# Altium PCB POWER_TESTER_V2.PcbDoc (part 2 of 2)
Units mm, origin at the board's own origin, x right, y up, seen from the top; angles counter-clockwise.
Board outline 100 x 151 mm, 2 copper layers (Top Layer, Bottom Layer); 154 components, 159 nets, 653 pads, 187 vias.
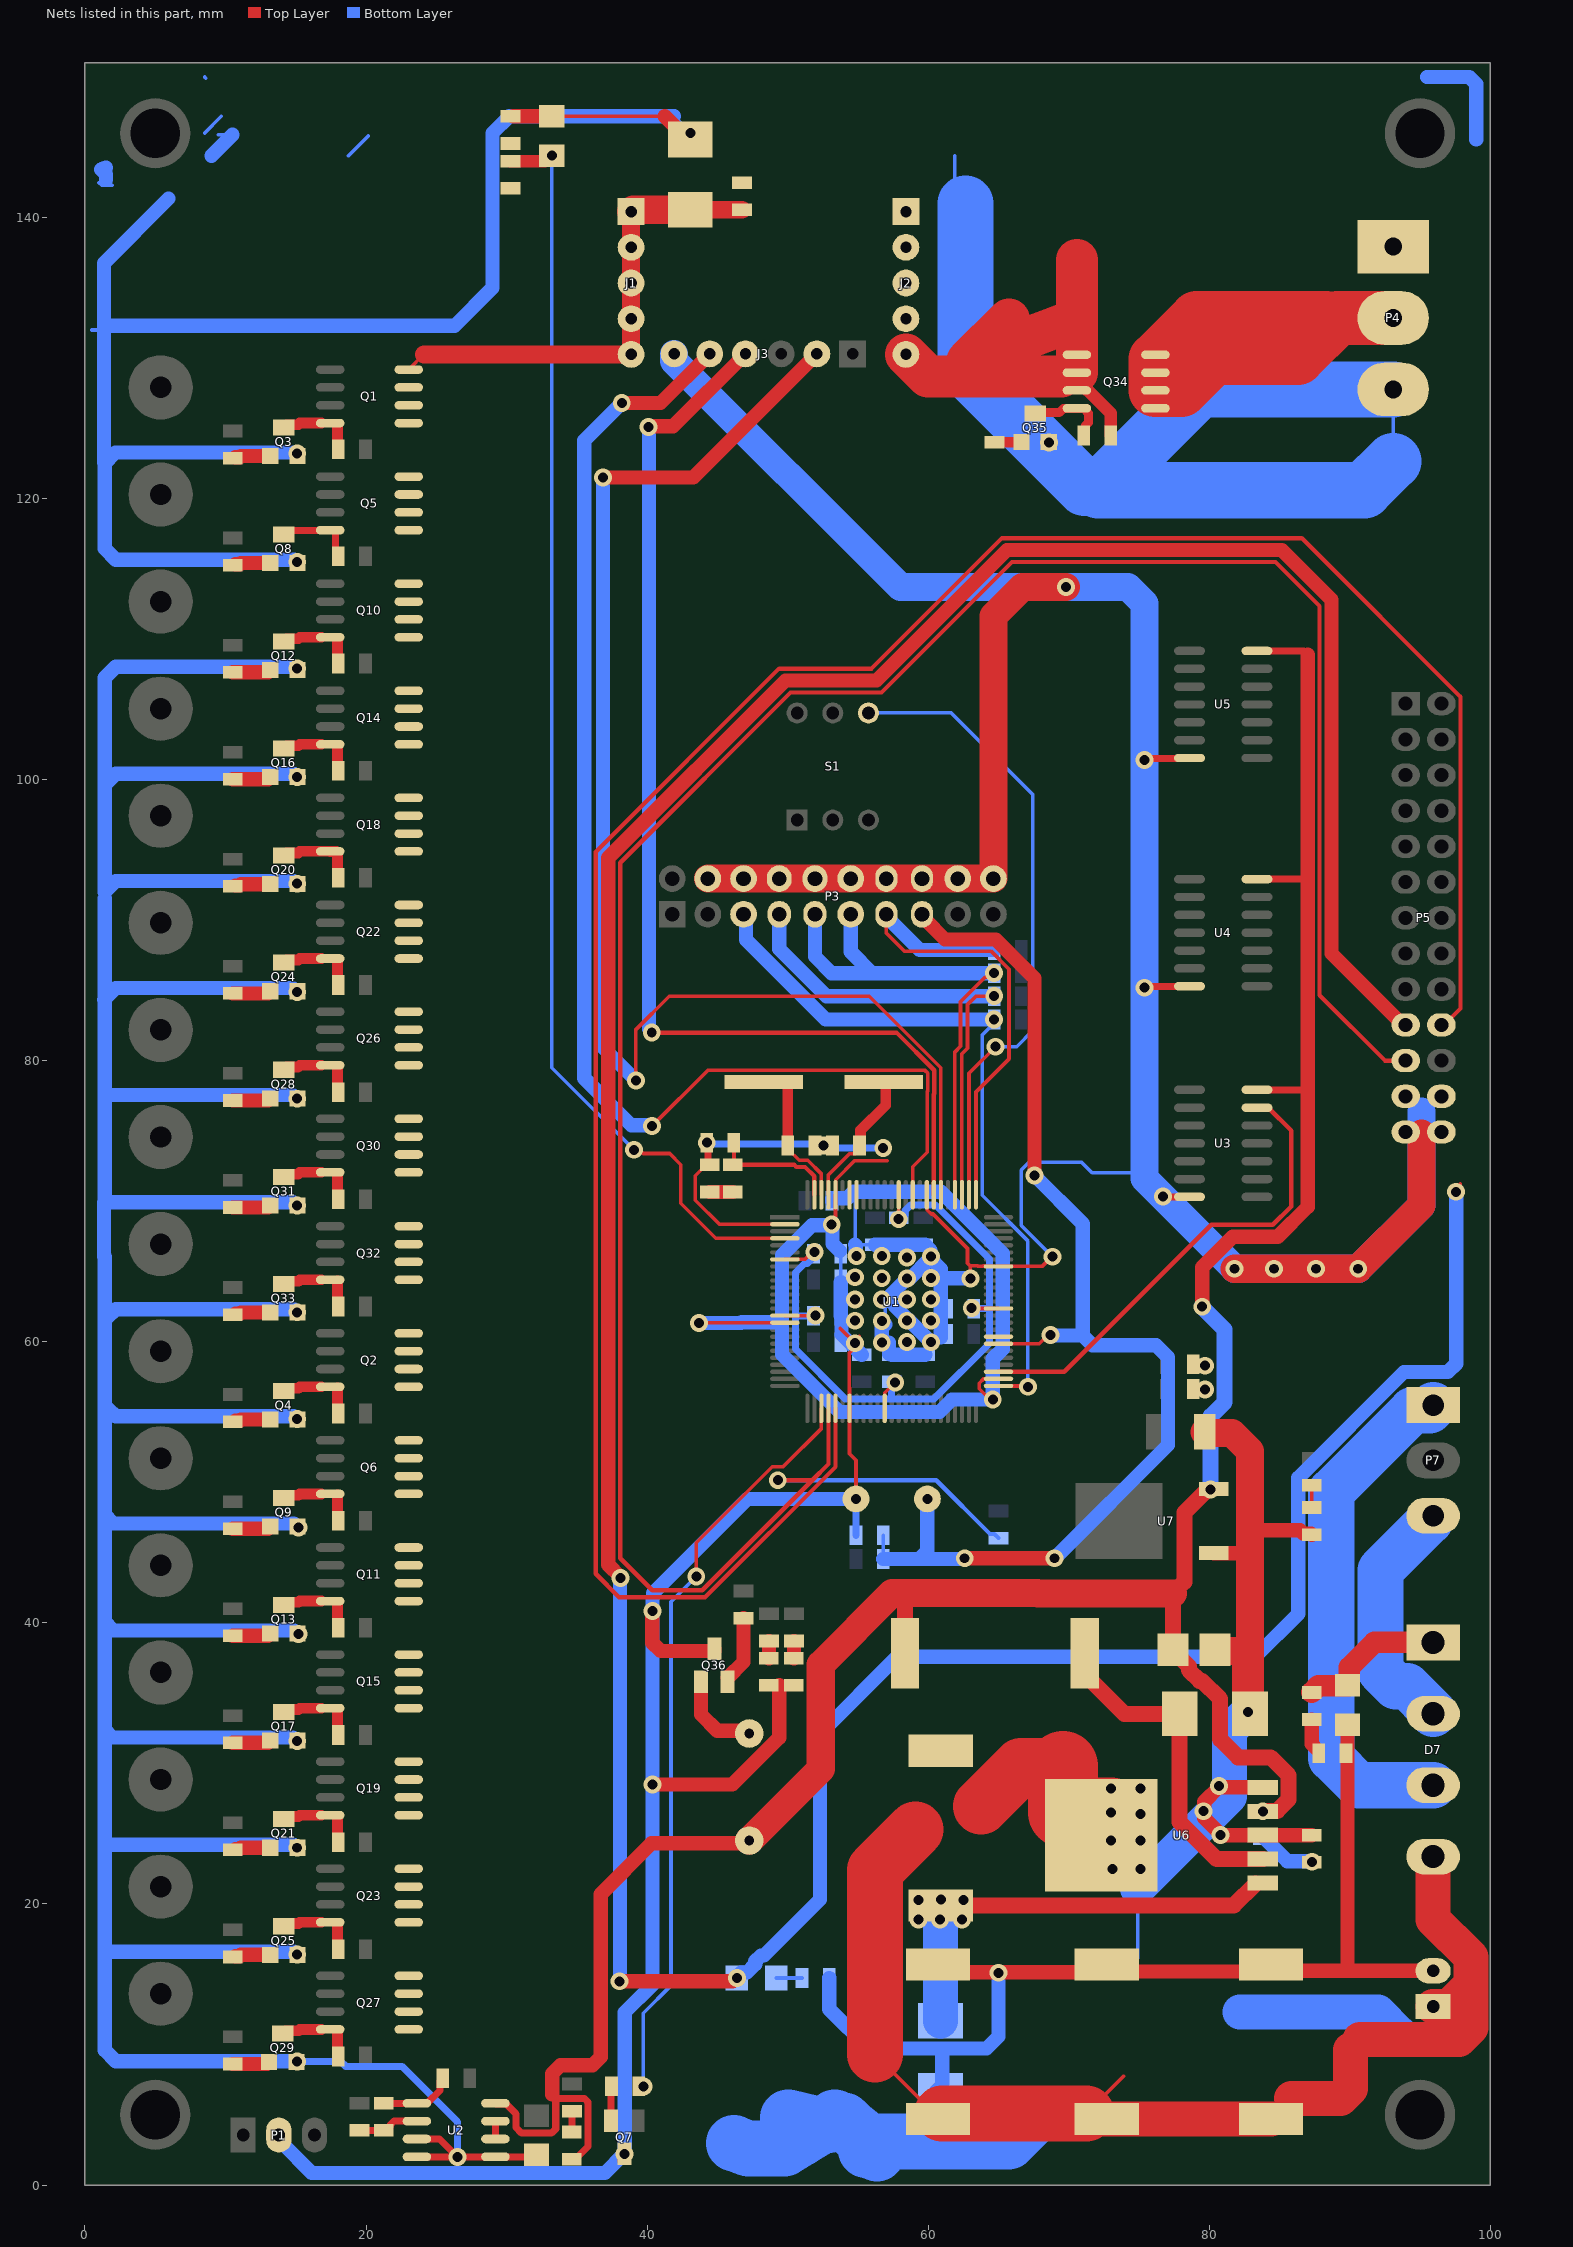
[diagram p2: the nets of this part, all layers, seen from the top]

## Via types
v1: diameter 1.27, hole 0.711, Top Layer to Bottom Layer, 187 vias

## Nets (pads, with @x,y where several pads share a name; then routed paths per layer and width w, separated by ;. In a path a pad name is that pad's centre, name@x,y a point inside that pad or via, vN(x,y) a via of type N, cw(c..) or ccw(c..) an arc to the next point about the centre after c; other vN are vias at no path point) (continued)
GND: C21.2 C22.2 C23.2 C24.2 C25.2 C26.2 C27.2 C28.2 D2.1 D3.1 D4.A D7.DC- D9.A D10.K D11.K P4.3 P6.1 Q3.3 Q4.3 Q8.3 Q9.3 Q12.3 Q13.3 Q16.3 Q17.3 Q20.3 Q21.3 Q24.3 Q25.3 Q28.3 Q29.3 Q31.3 Q33.3 Q35.3 R23.1 R50.2 U2.3 U2.4 U2.5 U6.GND U6.O\N\/OFF U7.2 | length 780
  Top Layer w0.254: D2.1@33.223,147.21 41.263,147.21 ; D4.A@43.078,145.553 42.92,145.553 D4.A@43.2,145.273 ; 56.223,9.291 C23.2@60.414,5.1 ; C22.2@71.25,5.1 73.9,7.75 ; v1(73,24.5) U6.GND@73,25.582 ; 82.6,38 82.6,45.1 ; C21.2@84.4,4.7 85.864,6.164
  Top Layer w0.5: U2.4@23.622,2.007 v1(26.5,2.007) ; U2.3@23.622,3.277 25.23,3.277 v1(26.5,2.007) ; D3.1@32.131,2.146 31.991,2.007 U2.5@29.21,2.007 v1(26.5,2.007)
  Top Layer w1.016: R23.1@30.469,147.207 33.22,147.207 D2.1@33.223,147.21 ; 41.263,147.21 D4.A@42.92,145.553 ; U7.2@80.33,44.959 82.459,44.959 82.6,45.1 ; v1(80.8,24.9) 80.8,24.969 79.649,26.12 79.649,27.28 80.7,28.331 v1(80.7,28.4) 80.769,28.4 80.873,28.296 83.806,28.296 U6.O\N\/OFF@83.81,28.292 ; v1@80.804,24.896 83.806,24.896 U6.GND@83.81,24.892 D11.K@87.296,24.892 ; 82.6,46.6 82.898,46.6 86.461,46.6 86.724,46.337 87.238,46.337 D10.K@87.296,46.279
  Top Layer w2: C24.2@79.676,53.594 79.755,53.515 81.603,53.515 82.898,52.22 82.898,46.6 82.898,45.1 82.898,37.972 82.898,33.798 v1(82.763,33.663) ; C28.2@80.414,38.1 80.514,38 82.6,38 82.628,37.972 82.628,33.798 v1(82.763,33.663) ; D9.A@82.898,33.528 v1(82.763,33.663)
  Top Layer w2.5: C23.2@60.7,4.7 C22.2@72.7,4.7 C21.2@84.4,4.7 ; 85.864,6.164 89.35,6.164 90.05,6.864 90.05,9.6 ; 90.75,10.359 97.779,10.359 98.623,11.203 98.623,14.271 ; P6.1@95.932,12.7 97.052,12.7 98.623,14.271 ; D7.DC-@95.932,23.368 95.932,18.9 98.623,16.209 98.623,14.271
  Top Layer w4: 56.223,9.291 56.223,22.424 59.1,25.3 ; C23.2@60.986,5.1 C22.2@71.25,5.1 ; 63.75,26.95 66.6,29.8 69.6,29.8
  Top Layer w5: 69.6,29.8 69.6,26.5 v1(73,26.5)
  Bottom Layer w0.254: 0.5,132 1.4,132 ; 1,142.492 1.194,142.298 1.934,142.298 ; 1.35,131.95 1.4,132 ; 1.692,132.292 1.4,132 ; 8.508,146.008 9.7,147.2 ; 8.508,150 8.6,149.908 ; 9.495,145.907 10.498,145.898 10.5,145.9 ; 18.75,144.4 20.155,145.805 ; 41.908,147.2 v1@43.1,146.008 ; 61.9,141.75 61.9,144.4 ; 71.835,120.765 72.265,120.765 ; 74.9,16.15 74.9,21.1 ; 93.091,122.666 P4.3@93.091,127.773
  Bottom Layer w0.5: v1(15.1,8.8) 18.204,8.8 18.554,8.45 22.55,8.45 26.5,4.5 v1(26.5,2.007)
  Bottom Layer w1.016: 1.35,66.05 1.35,69.939 ; 1.35,84.337 1.4,84.387 ; 1.35,131.95 1.35,122.55 1.4,122.5 ; 1.4,66.05 1.4,61.7 ; 1.4,91.55 1.4,84.387 ; 1.4,132 1.35,132.05 1.35,136.75 5.951,141.351 ; 1.492,142.7 1.492,143.075 1.146,143.421 cw(c1.674,142.553) 1.492,143.553 ; 1.692,132.292 26.292,132.292 29,135 29,146.008 30.192,147.2 41.908,147.2 ; 9,144.4 10.498,145.898 ; v1(15.1,8.8) 5.525,8.8 5.517,8.808 2.192,8.808 1.4,9.6 1.4,16.7 ; v1(15.1,16.4) 15.031,16.4 14.832,16.599 1.501,16.599 1.4,16.7 ; v1(15.1,24) 15.031,24 14.812,24.219 1.419,24.219 1.4,24.2 ; v1(15.1,31.6) 15.031,31.6 14.792,31.839 1.956,31.839 1.4,32.395 ; v1(15.1,54.5) 15.031,54.5 14.831,54.7 2.192,54.7 1.597,55.295 1.4,55.295 ; v1(15.1,62.1) 15.031,62.1 14.812,62.319 2.192,62.319 1.573,61.7 1.4,61.7 ; v1(15.1,69.7) 15.031,69.7 14.792,69.939 4.149,69.939 1.4,69.939 1.4,77.559 ; v1(15.1,77.3) 15.031,77.3 14.772,77.559 1.4,77.559 ; v1(15.1,84.9) 15.031,84.9 14.752,85.179 2.192,85.179 1.4,84.387 ; v1(15.1,92.6) 15.031,92.6 14.832,92.799 2.192,92.799 1.4,92.007 1.4,99.627 ; v1(15.1,100.2) 15.031,100.2 14.812,100.419 2.192,100.419 1.4,99.627 ; v1(15.1,107.9) 15.031,107.9 14.892,108.039 2.192,108.039 1.4,107.247 1.4,99.627 ; v1(15.1,115.5) 15.031,115.5 14.872,115.659 2.192,115.659 1.4,116.451 1.4,122.5 ; v1(15.1,123.2) 15.031,123.2 14.952,123.279 2.179,123.279 1.4,122.5 ; v1(15.2,39.2) 15.131,39.2 14.872,39.459 2.036,39.459 1.4,40.095 ; v1(15.2,46.8) 15.131,46.8 14.852,47.079 2.016,47.079 1.4,47.695 ; 45.7,2.5 46.179,2.979 46.3,3.1 49.449,3.1 ; v1(68.6,124) 71.835,120.765 ; 95.5,150 98.508,150 99,149.508 99,145.55 ; 1.4,16.7 1.4,24.2 ; 1.4,24.2 1.4,32.395 ; 1.4,32.395 1.4,40.095 ; 1.4,40.095 1.4,47.695 ; 1.4,47.695 1.4,55.295 ; 1.4,55.295 1.4,61.7 ; 1.4,77.559 1.4,84.387
  Bottom Layer w2.5: 74.9,21.1 81.45,27.65 81.45,32.35 v1(82.763,33.663) ; 82.2,12.3 92,12.3 93.5,10.8
  Bottom Layer w4: 46.179,2.979 47.213,2.592 49.761,2.592 50.956,3.328 52.026,3.987 52.439,4.242 ; 50.049,4.801 52.414,4.239 52.422,4.24 ; 52.418,4.239 cw(c52.877,0.266) 52.422,4.24 ; 52.951,4.265 ccw(c52.877,0.266) 52.439,4.242 ; 53.348,4.801 52.439,4.242 ; 54,4.6 54.361,4.239 ; 56.7,3.1 65.7,3.1 67.3,4.7 ; 62.65,141 62.65,129.254 71.139,120.765 71.835,120.765 ; 93.091,122.666 91.025,120.6 72.1,120.6 72.265,120.765 79.273,127.773 P4.3@93.091,127.773 ; 52.422,4.24 cw(c52.877,0.266) 52.439,4.242 ; 52.422,4.24 52.439,4.242 ; 52.439,4.242 54.125,4.436 54.361,4.239 ; 54.361,4.239 55.443,3.334 cw(c52.877,0.266) 55.597,3.198 55.597,3.003 ; 54.361,4.239 55.597,3.003 ; 55.597,3.003 56.35,2.25 55.597,2.5 55.597,3.003
  other v1: 73.1,22.5 75.1,22.5 75.1,24.5 75.1,26.4 79.6,26.6 73,28.2 75.1,28.2 79.7,56.6 79.7,58.3 43.1,146
JTAGSEL: S1.4 U1.77 | length 45.3
  Top Layer w0.254: U1.77@62.904,70.465 62.904,79.104 v1(64.8,81)
  Bottom Layer w0.254: S1.4@55.753,104.75 61.65,104.75 67.449,98.951 67.449,82.157 66.292,81 v1(64.8,81)
LOAD: J2.1 J2.2 J2.3 J2.4 J2.5 P4.1 Q34.1 Q34.2 Q34.3 R49.1 | length 40.4
  Top Layer w0.889: 69.473,128.7 69.473,128.554 Q34.3@70.157,127.87 ; Q34.2@70.587,128.967 70.726,128.827 70.726,128.328 ; Q34.2@70.806,128.967 Q34.2@70.946,128.828 ; 71.357,129.737 71.139,128.986 70.899,128.155 71.327,127.727 72.994,126.06 72.994,124.502 R49.1@72.999,124.497
  Top Layer w3: J2.5@58.42,130.262 59.982,128.7 62.813,128.7 69.473,128.7 ; 65.75,132.75 62.813,129.813 70.587,132.75 ; Q34.2@70.587,128.967 70.587,132.75 ; 70.587,136.987 70.587,132.75
NetC1_2: C1.2 R26.1 | length 1.7
  Top Layer w1.016: C1.2@44.45,70.663 R26.1@46.101,70.663
NetC2_2: C2.2 R26.2 U1.99 | length 9.1
  Top Layer w0.305: C2.2@46.177,74.168 46.177,72.669 R26.2@46.101,72.593 50.47,72.593 50.62,72.443 51.242,72.443 51.902,71.783 51.902,70.467 U1.99@51.904,70.465
NetC21_1: C21.1 C22.1 C23.1 D8.A F1.2 P6.2 R51.2 R52.2 | length 78
  Top Layer w1.016: C23.1@60.7,15.7 61.251,15.149 64.951,15.149 v1(65,15.1) 65.049,15.149 72.149,15.149 C22.1@72.7,15.7 73.2,15.2 83.9,15.2 C21.1@84.4,15.7 84.86,15.24 89.836,15.24 ; F1.2@89.836,32.76 89.836,15.24 ; P6.2@95.932,15.24 89.836,15.24
  Bottom Layer w1.016: R52.2@52.955,14.732 52.955,12.508 55.747,9.716 61,9.716 ; D8.A@61.198,6.684 D8.A@60.88,6.684 60.563,6.684 61,7.122 61,9.716 ; v1(65,15.1) 65,10.572 64.143,9.716 61,9.716
NetC27_1: C27.1 D8.K U6.VIN | length 30.5
  Top Layer w0.254: C27.1@61,19.8 C27.1@62.5,19.8 ; C27.1@62.5,20.014 v1(62.5,20.266)
  Top Layer w1.143: C27.1@62.5,20.014 62.615,19.9 81.746,19.9 U6.VIN@83.302,21.456
  Bottom Layer w2.5: v1(60.85,18.9) 60.88,18.87 D8.K@60.88,11.684
  other v1: 59.3,18.9 62.4,18.9 59.3,20.266 60.9,20.3
NetD1_A: D1.A R5.1 | length 1.5
  Top Layer w0.5: R5.1@34.646,3.771 34.649,3.774 34.649,5.255 D1.A@34.652,5.258
NetD5_2: D5.2 R52.1 | length 1.8
  Bottom Layer w0.254: D5.2@49.196,14.732 R52.1@51.025,14.732
NetD6_A: D6.A D7.DC+ F1.1 | length 10.8
  Top Layer w1.524: D6.A@87.296,35.052 87.766,35.522 89.898,35.522 89.974,35.598 89.974,36.841 91.741,38.608 D7.DC+@95.932,38.608
NetD6_K: D6.K R51.1 | length 2.4
  Top Layer w1.016: D6.K@87.296,33.122 87.296,31.376 R51.1@87.746,30.926
NetD7_AC1: D7.AC1 P7.1 | length 36.9
  Bottom Layer w3.302: D7.AC1@95.932,28.448 90.627,28.448 88.693,30.382 88.693,49.358 94.453,55.118 95.678,55.118 95.932,55.372 P7.1@95.932,55.499
NetD7_AC2: D7.AC2 P7.3 | length 17.2
  Bottom Layer w3.302: P7.3@95.678,47.244 92.186,43.752 92.186,36.575 93.264,35.496 94.09,35.496 95.932,33.655 D7.AC2@95.932,33.528
NetD9_K: D9.K L1.1 U6.OUT | length 24.1
  Top Layer w1.143: L1.1@71.14,37.846 71.14,36.346 73.958,33.528 D9.K@77.898,33.528 77.898,25.826 80.532,23.192 U6.OUT@83.81,23.192
NetD10_A: D10.A R53.2 | length 1.6
  Top Layer w0.254: D10.A@87.296,48.209 R53.2@87.296,49.784
NetD11_A: D11.A R54.2 | length 4
  Bottom Layer w1.016: R54.2@84.002,24.604 85.557,23.049 87.251,23.049 v1(87.3,23)
NetD100_A: D100.A R500.1 | length 1.2
  Top Layer w1.016: D100.A@48.666,37.49 48.669,37.493 48.669,38.707 R500.1@48.672,38.71
NetD101_A: D101.A R101.1 | length 1.2
  Top Layer w1.016: D101.A@50.444,37.49 50.447,37.493 50.447,38.707 R101.1@50.45,38.71
NetLS1_2A: LS1.2A Q36.3 | length 6.3
  Top Layer w1.016: Q36.3@43.83,35.807 43.83,33.483 44.988,32.325 47.075,32.325 LS1.2A@47.269,32.131
NetQ1_4: Q1.4 Q3.2 R3.2 | length 4.6
  Top Layer w0.762: Q3.2@14.148,125.07 14.338,125.26 15.176,125.26 15.291,125.374 Q1.4@16.815,125.374 ; Q1.4@17.965,125.298 17.965,123.589 R3.2@18.034,123.52
NetQ2_4: Q2.4 Q4.2 R4.2 | length 4.6
  Top Layer w0.762: Q4.2@14.148,56.505 14.338,56.695 15.192,56.695 15.291,56.794 Q2.4@16.815,56.794 ; Q2.4@17.965,56.718 17.965,54.963 R4.2@18.034,54.894
NetQ3_1: Q3.1 R1.2 | length 2.5
  Top Layer w1.016: R1.2@10.708,122.943 10.993,122.943 11.087,123.038 Q3.1@13.183,123.038
NetQ4_1: Q4.1 R2.2 | length 2.5
  Top Layer w1.016: R2.2@10.708,54.378 10.993,54.378 11.087,54.473 Q4.1@13.183,54.473
NetQ5_4: Q5.4 Q8.2 R9.2 | length 5.7
  Top Layer w0.5: Q8.2@14.148,117.451 14.43,117.733 17.429,117.733 Q5.4@17.45,117.754 17.783,117.754 17.834,117.704 17.834,116.095 R9.2@18.034,115.895
NetQ6_4: Q6.4 Q9.2 R10.2 | length 4.6
  Top Layer w0.762: Q9.2@14.148,48.887 14.338,49.077 15.193,49.077 15.291,49.174 Q6.4@16.815,49.174 ; Q6.4@17.965,49.098 17.965,47.338 R10.2@18.034,47.269
NetQ7_2: Q7.2 R6.2 | length 2.5
  Top Layer w0.5: Q7.2@37.429,4.56 37.447,4.578 37.447,7.018 R6.2@37.465,7.036
NetQ8_1: Q8.1 R7.2 | length 2.5
  Top Layer w1.016: R7.2@10.708,115.325 10.993,115.325 11.087,115.419 Q8.1@13.183,115.419
NetQ9_1: Q9.1 R8.2 | length 2.7
  Top Layer w1.016: R8.2@10.516,46.702 13.03,46.702 Q9.1@13.183,46.855
NetQ10_4: Q10.4 Q12.2 R13.2 | length 4.6
  Top Layer w0.762: Q12.2@14.148,109.833 14.338,110.023 15.18,110.023 15.291,110.134 Q10.4@16.815,110.134 ; Q10.4@17.965,110.058 17.965,108.339 R13.2@18.034,108.27
NetQ11_4: Q11.4 Q13.2 R14.2 | length 4.6
  Top Layer w0.762: Q13.2@14.148,41.268 14.338,41.459 15.195,41.459 15.291,41.554 Q11.4@16.815,41.554 ; Q11.4@17.965,41.478 17.965,39.713 R14.2@18.034,39.644
NetQ12_1: Q12.1 R11.2 | length 2.7
  Top Layer w1.016: R11.2@10.516,107.649 13.03,107.649 Q12.1@13.183,107.801
NetQ13_1: Q13.1 R12.2 | length 2.7
  Top Layer w1.016: R12.2@10.516,39.084 13.03,39.084 Q13.1@13.183,39.236
NetQ14_4: Q14.4 Q16.2 R20.2 | length 4.6
  Top Layer w0.762: Q16.2@14.148,102.215 14.338,102.405 15.182,102.405 15.291,102.514 Q14.4@16.815,102.514 ; Q14.4@17.965,102.438 17.965,100.714 R20.2@18.034,100.645
NetQ15_4: Q15.4 Q17.2 R21.2 | length 4.7
  Top Layer w0.762: Q17.2@14.148,33.65 14.338,33.84 15.197,33.84 15.291,33.934 Q15.4@16.815,33.934 ; Q15.4@17.965,33.858 17.965,32.088 R21.2@18.034,32.019
NetQ16_1: Q16.1 R16.2 | length 2.7
  Top Layer w1.016: R16.2@10.516,100.03 13.03,100.03 Q16.1@13.183,100.183
NetQ17_1: Q17.1 R17.2 | length 2.7
  Top Layer w1.016: R17.2@10.516,31.466 13.03,31.466 Q17.1@13.183,31.618
NetQ18_4: Q18.4 Q20.2 R27.2 | length 5.8
  Top Layer w0.762: Q20.2@14.148,94.596 14.338,94.787 15.178,94.787 15.291,94.9 17.444,94.9 Q18.4@17.45,94.894 17.889,94.894 17.965,94.818 17.965,93.089 R27.2@18.034,93.02
NetQ19_4: Q19.4 Q21.2 R28.2 | length 4.7
  Top Layer w0.762: Q21.2@14.148,26.032 14.338,26.222 15.199,26.222 15.291,26.314 Q19.4@16.815,26.314 ; Q19.4@17.965,26.238 17.965,24.463 R28.2@18.034,24.394
NetQ20_1: Q20.1 R24.2 | length 2.5
  Top Layer w1.016: R24.2@10.708,92.47 10.993,92.47 11.087,92.564 Q20.1@13.183,92.564
NetQ21_1: Q21.1 R25.2 | length 2.5
  Top Layer w1.016: R25.2@10.708,23.905 10.993,23.905 11.087,24 Q21.1@13.183,24
NetQ22_4: Q22.4 Q24.2 R36.2 | length 4.6
  Top Layer w0.762: Q24.2@14.148,86.978 14.338,87.169 15.185,87.169 15.291,87.274 Q22.4@16.815,87.274 ; Q22.4@17.965,87.198 17.965,85.464 R36.2@18.034,85.395
NetQ23_4: Q23.4 Q25.2 R37.2 | length 4.7
  Top Layer w0.762: Q25.2@14.148,18.413 14.338,18.604 15.2,18.604 15.291,18.694 Q23.4@16.815,18.694 ; Q23.4@17.965,18.618 17.965,16.838 R37.2@18.034,16.769
NetQ24_1: Q24.1 R34.2 | length 2.7
  Top Layer w1.016: R34.2@10.516,84.794 13.03,84.794 Q24.1@13.183,84.946
NetQ25_1: Q25.1 R35.2 | length 2.5
  Top Layer w1.016: R35.2@10.708,16.287 10.993,16.287 11.087,16.381 Q25.1@13.183,16.381
NetQ26_4: Q26.4 Q28.2 R43.2 | length 4.7
  Top Layer w0.762: Q28.2@14.148,79.36 14.338,79.55 15.161,79.55 15.291,79.68 Q26.4@16.815,79.68 ; Q26.4@17.965,79.604 17.965,77.839 R43.2@18.034,77.77
NetQ27_4: Q27.4 Q29.2 R44.2 | length 4.7
  Top Layer w0.762: Q29.2@14.072,10.795 14.262,10.986 15.202,10.986 15.291,11.074 Q27.4@16.815,11.074 ; Q27.4@17.965,10.998 17.965,9.213 R44.2@18.034,9.144
NetQ28_1: Q28.1 R40.2 | length 2.7
  Top Layer w1.016: R40.2@10.516,77.175 13.03,77.175 Q28.1@13.183,77.328
NetQ29_1: Q29.1 R41.2 | length 2.7
  Top Layer w1.016: R41.2@10.516,8.611 12.954,8.611 Q29.1@13.106,8.763
NetQ30_4: Q30.4 Q31.2 R46.2 | length 4.7
  Top Layer w0.762: Q31.2@14.148,71.741 14.338,71.932 15.163,71.932 15.291,72.06 Q30.4@16.815,72.06 ; Q30.4@17.965,71.984 17.965,70.214 R46.2@18.034,70.145
NetQ31_1: Q31.1 R45.2 | length 2.7
  Top Layer w1.016: R45.2@10.516,69.557 13.03,69.557 Q31.1@13.183,69.709
NetQ32_4: Q32.4 Q33.2 R48.2 | length 4.6
  Top Layer w0.762: Q33.2@14.148,64.123 14.338,64.314 15.19,64.314 15.291,64.414 Q32.4@16.815,64.414 ; Q32.4@17.965,64.338 17.965,62.589 R48.2@18.034,62.52
NetQ33_1: Q33.1 R47.2 | length 2.5
  Top Layer w1.016: R47.2@10.708,61.997 10.993,61.997 11.087,62.091 Q33.1@13.183,62.091
NetQ34_4: Q34.4 Q35.2 R49.2 | length 5.9
  Top Layer w0.635: Q35.2@67.615,126.046 67.684,126.115 69.329,126.115 69.614,126.4 Q34.4@70.56,126.4 ; Q34.4@70.587,126.427 71.272,126.427 71.285,126.414 71.285,126.17 71.4,126.055 71.4,125.415 71.202,125.217 71.202,124.629 R49.2@71.069,124.497
NetQ35_1: Q35.1 R480.2 | length 1.9
  Top Layer w0.762: R480.2@64.719,124.014 Q35.1@66.65,124.014
NetQ36_2: Q36.2 R38.2 | length 4.7
  Top Layer w1.016: Q36.2@45.738,36.099 46.863,37.224 R38.2@46.863,40.335
NetR15_1: R15.1 R19.2 U2.2 | length 4.5
  Top Layer w0.5: R19.2@19.533,3.887 21.51,3.887 21.71,4.087 21.71,4.254 22.003,4.547 U2.2@23.622,4.547
NetR15_2: R15.2 R22.1 U2.1 | length 5.3
  Top Layer w0.5: R15.2@21.26,5.817 U2.1@23.622,5.817 23.658,5.852 24.369,5.852 25.251,6.734 25.251,7.395 R22.1@25.451,7.595
NetU2_6: U2.6 U2.7 | length 1.3
  Top Layer w0.5: U2.6@29.21,3.277 U2.7@29.21,4.547
NRST: C4.1 P3.15 R33.1 SW1.2 U1.57 | length 85.9
  Top Layer w0.254: U1.57@65.004,59.865 67.898,59.865 68.524,60.491 v1(68.709,60.491)
  Top Layer w1.016: P3.15@59.563,90.424 59.753,90.234 59.753,90.083 61.204,88.632 64.81,88.632 67.572,85.87 v1(67.572,71.828) ; v1(62.6,44.6) v1(69,44.6)
  Bottom Layer w0.254: R33.1@56.794,44.552 C4.1@56.794,46.228
  Bottom Layer w1.016: R33.1@56.794,44.552 59.349,44.552 ; SW1.2@59.944,48.819 59.944,45.147 59.349,44.552 ; v1(62.6,44.6) 62.552,44.552 59.349,44.552 ; v1(67.572,71.828) 71,68.4 71,60.449 ; v1(68.709,60.491) 68.751,60.449 71,60.449 ; v1(69,44.6) 77.061,52.661 77.061,58.905 76.205,59.761 71.688,59.761 71,60.449
OUT1: D4.K J1.1 J1.2 J1.3 J1.4 J1.5 Q1.5 Q1.6 Q1.7 Q1.8 Q2.5 Q2.6 Q2.7 Q2.8 Q5.5 Q5.6 Q5.7 Q5.8 Q6.5 Q6.6 Q6.7 Q6.8 Q10.5 Q10.6 Q10.7 Q10.8 Q11.5 Q11.6 Q11.7 Q11.8 Q14.5 Q14.6 Q14.7 Q14.8 Q15.5 Q15.6 Q15.7 Q15.8 Q18.5 Q18.6 Q18.7 Q18.8 Q19.5 Q19.6 Q19.7 Q19.8 Q22.5 Q22.6 Q22.7 Q22.8 Q23.5 Q23.6 Q23.7 Q23.8 Q26.5 Q26.6 Q26.7 Q26.8 Q27.5 Q27.6 Q27.7 Q27.8 Q30.5 Q30.6 Q30.7 Q30.8 Q32.5 Q32.6 Q32.7 Q32.8 R18.2 R50.1 | length 34.4
  Top Layer w0.254: Q1.8@23.038,129.184 24.116,130.262
  Top Layer w1.27: 24.116,130.262 J1.5@38.862,130.262 J1.1@38.862,140.422 ; D4.K@43.078,140.553 R50.1@46.746,140.553
  Top Layer w2: J1.1@38.862,140.422 38.993,140.553 D4.K@43.078,140.553
"OVER CURRENT": J3.4 U1.82 | length 82.3
  Top Layer w0.305: v1(40.33,82) 57.753,82 60.433,79.32 60.433,77.652 60.404,77.623 U1.82@60.404,70.465
  Top Layer w1.016: v1(40.094,125.1) 40.143,125.149 41.849,125.149 J3.4@47,130.3
  Bottom Layer w1.016: v1(40.094,125.1) 40.132,125.063 40.132,82.267 40.33,82.069 v1(40.33,82)
"POWER GOOD": D5.1 P5.19 | length 278.3
  Top Layer w0.254: v1(97.57,70.674) 97.57,70.949 v1@97.853,71.233
  Top Layer w1.016: v1(38.032,14.5) 46.095,14.5 46.327,14.732 v1(46.396,14.732) ; v1(38.1,43.2) 38.1,43.269 37.234,44.135 37.234,94.437 49.848,107.051 56.32,107.051 65.607,116.338 85.162,116.338 88.702,112.798 88.702,87.637 93.582,82.757 93.773,82.757 P5.19@93.98,82.55
  Bottom Layer w1.016: v1(38.032,14.5) 38.066,14.534 38.066,43.166 v1(38.1,43.2) ; v1(46.396,14.732) 46.396,14.832 46.688,15.124 47.102,15.124 47.697,15.719 47.697,15.921 48.107,16.331 48.309,16.331 52.3,20.322 52.3,32.1 57.8,37.6 83.3,37.6 86.344,40.644 86.344,50.332 93.86,57.848 96.975,57.848 97.57,58.444 v1(97.57,70.674)
RESET: J3.5 U1.85 | length 93.5
  Top Layer w0.254: v1(40.353,75.353) 44.312,79.311 59.777,79.311 59.963,79.126 59.963,77.846 59.934,77.818 59.934,73.487 58.904,72.457 U1.85@58.904,70.465
  Top Layer w1.016: v1(38.2,126.8) 40.96,126.8 J3.5@44.46,130.3
  Bottom Layer w1.016: v1(38.2,126.8) 35.533,124.133 35.533,78.762 38.893,75.402 40.305,75.402 v1(40.353,75.353)
SC-LOAD: P4.2 Q34.5 Q34.6 Q34.7 Q34.8 | length 35.5
  Top Layer w0.254: 88.3,132.853 89.153,132.853
  Top Layer w3.81: 88.3,132.853 79.118,132.853 76.175,129.91 Q34.6@76.175,127.697 77.997,127.697 80.295,129.995 86.295,129.995 89.153,132.853 P4.2@93.091,132.853
SGND: C1.1 C2.1 C3.2 C4.2 C5.2 C6.1 C7.1 C10.1 C11.1 C12.1 C13.1 C14.1 C15.1 C16.1 C17.1 C18.1 C19.1 C20.1 D100.K D101.K J3.6 P1.2 P3.4 P3.6 P3.8 P3.10 P3.12 P3.14 P3.16 P3.18 P3.20 P5.23 P5.24 P5.25 P5.26 Q7.1 Q36.1 SW1.1 U1.2 U1.16 U1.32 U1.52 U1.68 U1.83 U1.96 U3.7 U4.7 U5.7 | length 486.7
  Top Layer w0.254: v1(43.7,61.343) 43.713,61.356 49.795,61.356 U1.16@49.804,61.365 ; C1.1@44.45,72.593 44.2,72.593 43.432,71.826 43.432,70.081 45.149,68.365 U1.2@49.804,68.365 ; D100.K@48.666,35.56 49.4,35.56 D101.K@50.444,35.56 ; C7.1@51.943,73.965 C6.1@53.188,73.965 ; v1(53.138,68.344) 53.138,68.619 53.404,68.885 U1.96@53.404,70.465 53.413,70.474 53.413,71.535 54.778,72.9 57.076,72.9 ; 53.752,60.948 v1(54.8,59.9) 54.8,59.625 54.386,59.211 54.386,56.744 54.404,56.726 54.404,52.035 54.864,51.575 SW1.1@54.864,48.819 ; v1@55.1,59.9 v1@55.1,60.4 ; U1.83@59.913,70.456 59.913,69.544 59.927,69.53 59.927,69.509 59.936,69.5 59.936,69.371 60.21,69.098 60.344,69.098 62.8,66.642 62.8,65.6 63,65.4 ; v1(63,64.5) 63,65.4 ; 63.91,65.365 63.559,65.365 63.524,65.4 63,65.4 ; 63.91,65.398 64.039,65.398 64.048,65.388 64.069,65.388 64.092,65.365 68.098,65.365 68.792,66.059 v1(68.841,66.059) ; v1(64.6,55.889) 64.418,55.889 63.637,56.671 63.637,57.059 63.934,57.356 64.995,57.356 U1.52@65.004,57.365
  Top Layer w0.5: v1(44.247,74.168) 44.348,74.066 44.348,72.695 C1.1@44.45,72.593 ; v1(75.4,85.2) 75.483,85.283 78.581,85.283 U4.7@78.6,85.302 ; v1(75.4,101.4) 75.523,101.523 78.439,101.523 U5.7@78.458,101.542 ; v1(76.7,70.331) 76.71,70.322 78.59,70.322 U3.7@78.6,70.312
  Top Layer w0.508: Q7.1@38.133,1.664 38.133,1.933 v1(38.4,2.2)
  Top Layer w1.016: v1(40.378,28.5) 46.063,28.5 49.4,31.837 49.4,35.56 ; v1(40.378,40.849) 40.371,40.842 40.371,38.595 40.966,38 44.772,38 44.78,38.008 Q36.1@44.78,38.157
  Top Layer w2: P3.4@44.323,92.964 P3.6@46.863,92.964 P3.8@49.403,92.964 P3.10@51.943,92.964 P3.12@54.483,92.964 P3.14@57.023,92.964 P3.16@59.563,92.964 P3.18@62.103,92.964 P3.20@64.643,92.964 64.643,111.643 66.7,113.7 v1(69.8,113.7) ; v1(81.8,65.2) v1(90.6,65.2) 95.1,69.7 95.1,74.835
  Bottom Layer w0.254: C3.2@53.772,64.44 C5.2@53.771,66.269 ; 54.8,70.673 54.8,66.9 C20.1@56.21,66.9 ; v1(56.7,63) v1@56.848,62.852 ; v1@56.943,61.232 56.943,62.741 v1@57.186,62.984 ; v1(58.5,61.5) v1@58.668,61.5 ; v1(58.5,64.5) v1@58.7,64.5 ; v1@59.937,65.812 v1(60.2,66.075) ; v1(68.841,66.059) 66.619,68.281 66.619,72.223 67.177,72.781 70.914,72.781 71.663,72.032 75.4,72.032
  Bottom Layer w0.5: v1(44.247,74.168) 44.349,74.066 52.464,74.066 52.713,73.817 53.187,73.817 53.204,73.8 v1(56.8,73.8) ; C4.2@54.864,46.228 SW1.1@54.864,48.819
  Bottom Layer w1.016: P1.2@13.792,3.556 14.048,3.3 14.048,2.95 16.135,0.864 36.995,0.864 38.331,2.2 v1(38.4,2.2) 38.4,12.282 40.378,14.26 v1(40.378,28.5) ; v1@40.378,28.617 40.378,41.734 40.426,41.782 40.426,42.112 47.133,48.819 SW1.1@54.864,48.819 ; v1(43.7,61.343) 46.68,61.343 46.737,61.4 49.6,61.4 ; v1(53.138,68.344) 53.089,68.295 51.73,68.295 49.6,66.165 49.6,61.4 ; C19.1@53.162,70.028 53.162,70.162 53.22,70.22 54.236,70.22 54.689,70.673 54.8,70.673 60.915,70.673 65.3,66.288 65.3,59.494 64.6,58.794 64.6,55.9 64.589,55.889 61.696,55.889 60.806,55 53.696,55 49.6,59.096 49.6,61.4 ; v1@53.187,68.227 53.187,66.987 C5.2@53.713,66.461 ; C3.2@53.772,64.248 C15.1@53.771,61.849 53.829,61.791 53.829,60.521 C11.1@55.27,59.08 ; 54.8,66.9 54.851,66.849 54.851,66.149 v1(54.9,66.1) ; C20.1@56.21,66.904 C14.1@59.773,66.904 ; v1(56.7,59.95) 56.7,60.989 v1@56.943,61.232 ; v1@56.85,62.85 v1(58.5,64.5) ; v1@57.186,59.95 57.186,59.428 57.212,59.402 C16.1@57.212,59.138 ; C16.1@57.404,59.08 C12.1@59.792,59.08 ; 57.655,62.513 58.5,61.668 v1(58.5,61.5) ; v1@58.668,61.5 60.193,59.975 v1(60.2,59.975) ; v1@58.7,64.5 v1@60.151,65.951 ; C14.1@59.831,66.846 60.151,66.526 v1@60.151,65.958 ; v1@60.145,65.943 60.9,65.188 60.9,64.525 ; v1(60.2,64.55) 60.225,64.525 60.9,64.525 ; C13.1@60.9,60.314 60.9,64.525 ; v1(63,64.5) 62.975,64.525 60.9,64.525
  Bottom Layer w2: J3.6@41.92,130.3 41.92,129.809 58.029,113.7 74.228,113.7 75.4,112.528 v1(75.4,85.2) 75.4,72.032 75.4,71.631 81.8,65.231 v1(81.8,65.2) v1(90.6,65.2) 95.1,69.7 95.1,76.4
  other v1: 58.5,60 56.7,61.475 54.8,61.5 60.2,61.5 54.8,63 58.5,63 60.2,63.025 56.7,64.525 54.8,64.6 84.6,65.2 87.6,65.2 58.5,66 56.7,66.1 52.566,73.965
"SHUT DOWN": J3.2 U1.81 | length 100.2
  Top Layer w0.254: v1(39.206,78.6) 39.206,82.223 41.583,84.6 55.817,84.6 60.904,79.513 U1.81@60.904,70.465
  Top Layer w1.016: v1(36.866,121.5) 43.28,121.5 J3.2@52.08,130.3
  Bottom Layer w1.016: v1(36.866,121.5) 36.866,80.94 v1(39.206,78.6)
START_SWITCH: P5.21 R200.2 U1.29 | length 188.5
  Top Layer w0.305: v1(49.3,50.152) 51.752,50.152 ; U1.29@52.904,55.265 52.904,51.304 51.752,50.152 ; P5.21@93.98,80.01 92.507,80.01 87.851,84.666 87.851,112.349 84.713,115.487 65.96,115.487 56.672,106.2 50.2,106.2 38.085,94.085 38.085,44.598 40.361,42.322 43.922,42.322 51.752,50.152
  Bottom Layer w0.305: v1(49.3,50.152) 60.578,50.152 64.397,46.333 64.702,46.333 R200.2@65,46.035
START_SWITCH_LED: P5.20 U1.30 | length 176.6
  Top Layer w0.305: U1.30@53.404,55.265 53.404,51.104 44.127,41.827 38.007,41.827 36.343,43.491 36.343,94.85 49.395,107.902 55.967,107.902 65.255,117.189 86.583,117.189 97.879,105.894 97.879,83.718 96.711,82.55 P5.20@96.52,82.55
TCK: P3.9 P3.11 R30.1 U1.79 | length 38.2
  Top Layer w0.254: U1.79@61.904,70.465 61.904,80.628 62.3,81.024 62.3,84.2 64.049,85.949 64.135,85.949 64.419,86.233 v1(64.694,86.233)
  Bottom Layer w1.016: P3.9@51.943,90.424 51.943,87.416 53.126,86.233 56,86.233 ; P3.11@54.483,90.424 54.483,87.75 56,86.233 ; v1(64.694,86.233) 56,86.233
TDI: P3.5 R32.1 U1.51 | length 51.8
  Top Layer w0.254: U1.51@65.004,56.865 65.013,56.856 67.044,56.856 v1(67.1,56.8)
  Bottom Layer w0.254: v1(64.694,82.931) 64.694,82.681 63.847,81.835 63.847,70.424 67.1,67.171 v1(67.1,56.8)
  Bottom Layer w1.016: P3.5@46.863,90.424 47.033,90.254 47.033,88.611 52.713,82.931 v1(64.694,82.931)
TDO: P3.13 R29.1 U1.76 | length 37
  Top Layer w0.254: P3.13@57.023,90.424 57.023,89.09 58.307,87.806 64.468,87.806 65.752,86.522 65.752,80.128 63.404,77.78 U1.76@63.404,70.465
  Bottom Layer w1.016: P3.13@57.023,90.424 57.206,90.241 57.206,90.076 59.398,87.884 R29.1@64.694,87.884
TMS: P3.7 R31.1 U1.78 | length 35
  Top Layer w0.254: U1.78@62.404,70.465 62.404,80.5 62.8,80.896 62.8,84 63.4,84.6 v1(64.7,84.6)
  Bottom Layer w1.016: P3.7@49.403,90.424 49.403,87.947 52.768,84.582 R31.1@64.694,84.582
TST: U1.58
"UC CLOCK COMMAND": R6.1 U1.28 | length 54
  Top Layer w0.254: v1(43.5,43.3) 43.5,45.699 48.905,51.105 49.675,51.105 52.404,53.834 U1.28@52.404,55.265
  Bottom Layer w0.254: v1(39.733,7) 39.733,12.233 41.7,14.2 41.7,41.5 v1(43.5,43.3)
"USB DM": U1.93
"USB DP": U1.94
VCC: C28.1 L1.2 LS1.1A R5.2 R54.1 U2.8 U3.14 U4.14 U5.14 U6.FB U7.1 | length 197.2
  Top Layer w0.5: U2.8@29.21,5.817 29.246,5.78 29.956,5.78 30.666,5.07 30.666,4.088 31.049,3.706 33.213,3.706 33.5,3.992 33.5,6.149 ; 33.257,6.445 33.257,6.442 33.55,6.149 35.534,6.149 35.792,5.891 35.792,2.737 34.896,1.841 R5.2@34.646,1.841 ; U3.14@83.4,77.932 87,77.932 ; U4.14@83.4,92.922 87,92.922 ; U5.14@83.4,109.162 86.738,109.162 87,108.9
  Top Layer w1.016: 33.257,6.445 33.253,6.449 33.253,7.928 33.845,8.519 36.107,8.519 36.698,9.111 36.698,20.698 40.317,24.317 47.075,24.317 LS1.1A@47.269,24.511 ; v1(79.5,62.5) 79.5,65.302 81.673,67.475 84.876,67.475 87,69.599 87,77.932 87,92.922 87,108.9
  Top Layer w1.143: 58.2,42.133 58.34,41.993 L1.2@58.34,37.846 ; U7.1@79.851,49.457 78.235,47.841 78.235,42.921 77.414,42.1 77.414,38.05 78.552,36.912 78.552,36.634 79.309,35.877 79.484,35.877 80.772,34.589 80.772,31.719 82.06,30.431 84.364,30.431 85.652,29.143 85.652,27.441 84.839,26.628 83.847,26.628 v1(83.81,26.592)
  Top Layer w2: LS1.1A@47.269,24.511 52.359,29.601 52.359,37.049 57.443,42.133 58.2,42.133 67.791,42.133 67.823,42.1 77.414,42.1
  Bottom Layer w1.143: v1(79.5,62.5) 79.5,62.466 81.097,60.869 81.097,55.7 80.1,54.703 v1(80.1,49.5)
"VOLTAGE SAMPLE": D2.2 R18.1 R23.2 U1.4 | length 91.2
  Top Layer w0.254: v1(39.063,73.667) 39.257,73.473 39.646,73.473 39.719,73.4 41.6,73.4 42.4,72.6 42.4,69.857 44.892,67.365 U1.4@49.804,67.365
  Top Layer w0.889: R18.1@30.277,144.003 32.716,144.003 33.123,144.41 v1(33.223,144.41)
  Bottom Layer w0.254: v1(33.223,144.41) 33.223,79.507 v1(39.063,73.667)
"VOLTAGE TEST _G": U1.53 U3.13 | length 34.2
  Top Layer w0.305: U1.53@65.004,57.865 69.68,57.865 80.141,68.325 84.524,68.325 85.834,69.635 85.834,75.029 84.2,76.662 U3.13@83.4,76.662
"VOUT 1.8V": C5.1 C15.2 C16.2 C17.2 C18.2 U1.7 U1.15 U1.37 U1.62 U1.87 | length 53.5
  Top Layer w0.254: U1.15@49.804,61.865 49.808,61.869 51.969,61.869 v1(51.974,61.874) ; U1.7@49.804,65.865 51.235,65.865 51.77,66.4 v1(51.9,66.4) ; U1.37@56.904,55.265 56.913,55.274 56.913,56.384 57.636,57.108 v1(57.654,57.108) ; v1(57.904,68.727) U1.87@57.904,70.465 ; v1(63.1,62.4) 63.126,62.374 64.995,62.374 U1.62@65.004,62.365
  Bottom Layer w0.254: C5.1@51.841,66.341 v1(51.9,66.4) ; C16.2@57.404,57.15 57.611,57.15 v1(57.654,57.108) ; C18.2@57.912,68.834 C18.2@58.162,68.834
  Bottom Layer w0.5: C5.1@51.841,66.341 51.841,66.019 51.403,65.58 51.209,65.58 50.548,64.92 50.548,61.849 ; v1(51.974,61.874) 51.866,61.874 C15.2@51.841,61.849 50.548,61.849 ; C16.2@57.404,57.108 57.404,56.093 57.26,55.948 ; v1(57.904,68.727) 57.904,68.826 C18.2@57.912,68.834 ; C18.2@58.162,68.834 58.362,69.034 58.362,69.33 58.757,69.725 60.522,69.725 64.351,65.895 64.351,62.357 ; C17.2@63.246,62.357 64.351,62.357 ; 50.548,61.849 50.548,59.489 54.089,55.948 57.26,55.948 ; 57.26,55.948 60.413,55.948 64.351,59.887 64.351,62.357
XIN: C6.2 U1.97 Y1.1 | length 10
  Top Layer w0.254: U1.97@52.904,70.465 52.904,71.896 54.4,73.392 54.795,73.392 55.118,73.715 C6.2@55.118,73.965
  Top Layer w0.762: C6.2@55.118,73.965 55.187,74.034 55.187,75.049 56.973,76.835 Y1.1@56.973,78.359 ; Y1.1@56.845,78.486 Y1.1@56.972,78.359
XOUT: C7.2 U1.98 Y1.2 | length 11
  Top Layer w0.254: C7.2@50.013,73.965 50.013,73.715 50.815,72.913 51.437,72.913 52.404,71.945 U1.98@52.404,70.465
  Top Layer w0.762: Y1.2@48.311,78.486 49.886,78.486 50.013,78.359 C7.2@50.013,73.965
pads on no net: P3.3 P3.17 P3.19 P5.22 P7.2 S1.6 U1.6 U1.31 U1.34 U1.36 U1.40 U1.41 U1.42 U1.43 U1.44 U1.45 U1.46 U1.47 U1.49 U1.50 U1.86 U1.88 U1.89 U1.90 U1.91

## Other copper
Top Layer:
  rectangle net GND: 67.3,0 92,5.3
  rectangle net GND: 52.9,3.3 62.2,10.9
  rectangle net GND: 47.9,0 57.3,20
  rectangle net GND: 55.8,0 68.1,5.6
  rectangle net OUT1: 21.5,9.4 36,141.8
  rectangle net +3.3V: 47,69.2 51.1,72.1
  rectangle net GND: 55.9,8.4 58.9,12.3
  rectangle net +3.3V: 70.4,44.6 77.4,58.1
  rectangle net GND: 8,0.4 9.5,9.3
  rectangle net GND: 0,8.3 9.5,9.3
  rectangle net GND: 0,8.3 2.7,132.7
  rectangle net GND: 1,0 9.5,2.1
  rectangle net GND: 0,0 2,132.7
  rectangle net GND: 8,139.7 19.5,150.9
  rectangle net GND: 0,131.5 19.5,143
  rectangle net GND: 0,131.5 2,149.7
  rectangle net GND: 0,149 9.9,151
  rectangle net GND: 91.4,149 100,151
  rectangle net GND: 98,142.5 100,151
  rectangle net GND: 89.2,142.1 100,143
  rectangle net GND: 8,146.5 37.2,151
  rectangle net GND: 35.1,142.1 92,151
  rectangle net LOAD: 59.7,129.1 71.8,136.4
  rectangle net LOAD: 59.7,135.1 96.5,140.3
  rectangle net SC-LOAD: 76.7,125.8 89.9,131.9
  rectangle net GND: 88.1,3.2 92,12.3
  rectangle net LOAD: 57.2,129.1 59.7,141.6
  rectangle net OUT1: 29.5,129 40.1,132.6
  rectangle net OUT1: 29.5,132.2 44.4,141.9
  rectangle net GND: 55.4,21.6 72.1,32.3
  rectangle net GND: 58.3,3.2 89.5,12.3
  region net OUT1: 29.591,142.519 29.591,142.621 cw(c29.845,142.621) 29.845,142.875 30.734,142.875 cw(c30.734,142.646) 30.963,142.646 30.963,142.418
  region net +3.3V: 77.39,59.131 77.39,52.324 75.333,52.324 75.333,59.131
  region net CH16: 11.1,12.09 5.385,11.328 5.385,15.9 11.1,15.138
  region net CH15: 11.1,19.71 5.385,18.948 5.385,23.52 11.1,22.758
  region net CH14: 11.1,27.33 5.385,26.568 5.385,31.14 11.1,30.378
  region net CH13: 10.973,34.95 5.258,34.188 5.258,38.76 10.973,37.998
  region net CH12: 11.1,42.57 5.385,41.808 5.385,46.38 11.1,45.618
  region net CH11: 11.1,50.19 5.385,49.428 5.385,54 11.1,53.238
  region net CH10: 10.973,57.81 5.258,57.048 5.258,61.62 10.973,60.858
  region net CH9: 10.973,65.43 5.258,64.668 5.258,69.24 10.973,68.478
  region net CH8: 10.973,73.05 5.258,72.288 5.258,76.86 10.973,76.098
  region net CH7: 11.1,80.67 5.385,79.908 5.385,84.48 11.1,83.718
  region net CH6: 11.1,88.29 5.385,87.528 5.385,92.1 11.1,91.338
  region net CH5: 11.1,95.91 5.385,95.148 5.385,99.72 11.1,98.958
  region net CH4: 11.1,103.53 5.385,102.768 5.385,107.34 11.1,106.578
  region net CH3: 11.1,111.15 5.385,110.388 5.385,114.96 11.1,114.198
  region net CH2: 11.1,118.77 5.385,118.008 5.385,122.58 11.1,121.818
  region net CH1: 11.1,126.39 5.385,125.628 5.385,130.2 11.1,129.438
  region net SGND: 51.549,74.701 53.708,74.701 53.708,73.304 51.549,73.304
  region net SGND: 93.066,78.308 97.536,78.308 97.536,74.143 93.066,74.143
  region net SGND: 57.836,74.625 58.014,74.447 58.036,72.667 57.76,72.39 56.018,72.39 55.88,72.568 55.88,74.422 56.083,74.625
  region net SGND: 60.96,67.056 61.468,66.548 61.468,59.182 60.96,58.674 54.102,58.674 53.594,59.182 53.594,66.548 54.102,67.056
  region net GND: 80.413,52.324 78.406,52.324 78.406,59.106 80.413,59.106
  region net NetQ34_4: 70.764,125.197 72.009,125.197 72.009,123.8 70.612,123.8
  region net "VOLTAGE SAMPLE": 29.591,144.932 29.591,144.003 30.328,144.003 30.328,145.034
  pour cut-out: 90.475,8.99 90.475,0.1 100,0.1 100,8.99
Bottom Layer:
  rectangle net GND: 44.1,0 58.5,9
  rectangle net GND: 87.2,123.3 100,130.4
  rectangle net GND: 66.9,122.8 88.2,134.1
  rectangle net GND: 61.8,127.5 89.3,142.3
  rectangle net GND: 44.6,4 55.498,5.602
  rectangle net GND: 44.1,0 68.6,4.5
  rectangle net +3.3V: 47,69.2 51.1,72.1
  rectangle net SGND: 53.771,59.568 60.6,66.4
  rectangle net GND: 87.9,118.6 99.9,124.9
  rectangle net GND: 76.3,120.9 96,126
  rectangle net GND: 60.6,142.3 89.5,145.8
  rectangle net GND: 90.2,8 100,11.1
  rectangle net GND: 91.5,0.2 99.2,1.9
  rectangle net GND: 82.4,0 92,12.3
  rectangle net GND: 78.1,0 100,0.8
  rectangle net GND: 67.3,0 82.5,32.3
  rectangle net GND: 96.5,127.1 99.8,141.7
  rectangle net GND: 98.4,0 100,143
  rectangle net GND: 21.2,6.5 24.5,8.7
  rectangle net GND: 15.1,6.5 24.5,7.593
  rectangle net GND: 8.1,0 9.8,7.2
  rectangle net GND: 8.9,6.5 15.2,9.3
  rectangle net GND: 8,2.1 9.7,9.2
  rectangle net GND: 0,0 9.7,2.1
  rectangle net GND: 0,0.1 2,2.1
  rectangle net GND: 0,0 2,9.239
  rectangle net GND: 87.6,142.4 92,146.6
  rectangle net GND: 60.6,140.5 100,143
  rectangle net GND: 98,141.5 100,149.6
  rectangle net GND: 91,149 100,151
  rectangle net GND: 25.8,133 27.7,134.6
  rectangle net GND: 26.3,134.6 28.8,135
  rectangle net GND: 25.4,134.3 28.7,142.3
  rectangle net GND: 43.8,145.5 92,151
  rectangle net GND: 1.6,149 8.9,151
  rectangle net GND: 0,141.4 2,151
  rectangle net GND: 8,141.9 29.5,146.9
  rectangle net GND: 8,145.5 44.7,151
  rectangle net GND: 0,123.6 2.7,132.8
  rectangle net GND: 0,131.9 26.3,143
  rectangle net GND: 0,8.3 2.7,123.8
  pour cut-out: 20.995,130.175 65.888,130.175 65.888,111.125 20.995,111.125
  pour cut-out: 12.914,5.544 12.914,0 47.092,0 47.092,8.738 12.929,8.738 12.929,8.382
  pour cut-out: 2.565,130.454 18.847,130.454 18.847,11.608 2.565,11.608
  region net SGND: 51.486,74.701 53.645,74.701 53.645,73.304 51.486,73.304
  region net SGND: 93.066,78.308 97.536,78.308 97.536,74.143 93.066,74.143
  region net NetC27_1: 58.594,20.574 63.166,20.574 63.166,18.034 58.594,18.034

## Silkscreen, mask and mechanical layers (free items; w line width, h text height)
Top Overlay:
  drawing of 15 lines, arcs and shapes, not listed
  text "GND" at 15.502,139.446 h1.52
  text "LOAD" at 79.764,137.16 h1.52
  text "Sensor board" at 41.402,133.858 h1.52
  text "SC-LOAD" at 79.764,132.08 h1.52
  text "GND" at 79.764,127.254 h1.52
  text "CH1" at 1.93,123.698 h1.52
  text "CH2" at 1.567,116.078 h1.52
  text "CH3" at 1.567,108.458 h1.52
  text "CH4" at 1.422,100.33 h1.52
  text "CH5" at 1.567,92.964 h1.52
  text "CH6" at 1.567,85.09 h1.52
  text "CH7" at 1.567,78.232 h1.52
  text "CH8" at 1.567,70.358 h1.52
  text "CH9" at 1.567,62.738 h1.52
  text "CH10" at 0.653,54.864 h1.52
  text "CH11" at 1.016,47.752 h1.52
  text "CH12" at 0.653,39.624 h1.52
  text "CH13" at 0.653,32.004 h1.52
  text "CH14" at 0.508,24.384 h1.52
  text "CH15" at 0.653,17.272 h1.52
  text "CH16" at 0.653,9.398 h1.52

## Text inside footprints (layer, text, board x,y; h text height)
P5: Top Overlay "25" at 93.23,73.65 h1.5 r270; Top Overlay "26" at 95.77,73.65 h1.5 r270; Top Overlay "1" at 93.23,107.19 h1.5 r270; Top Overlay "2" at 95.77,107.69 h1.5 r270